# Altium PCB BMS_MAINBOARD_3.PcbDoc (part 3 of 3)
Units mm, origin at the board's own origin, x right, y up, seen from the top; angles counter-clockwise.
Board outline 295.3 x 101.15 mm, 2 copper layers (Top Layer, Bottom Layer), stack 1.571 mm thick; 250 components, 184 nets, 817 pads, 458 vias.
Unrouted connection lines stored in the file: 84.
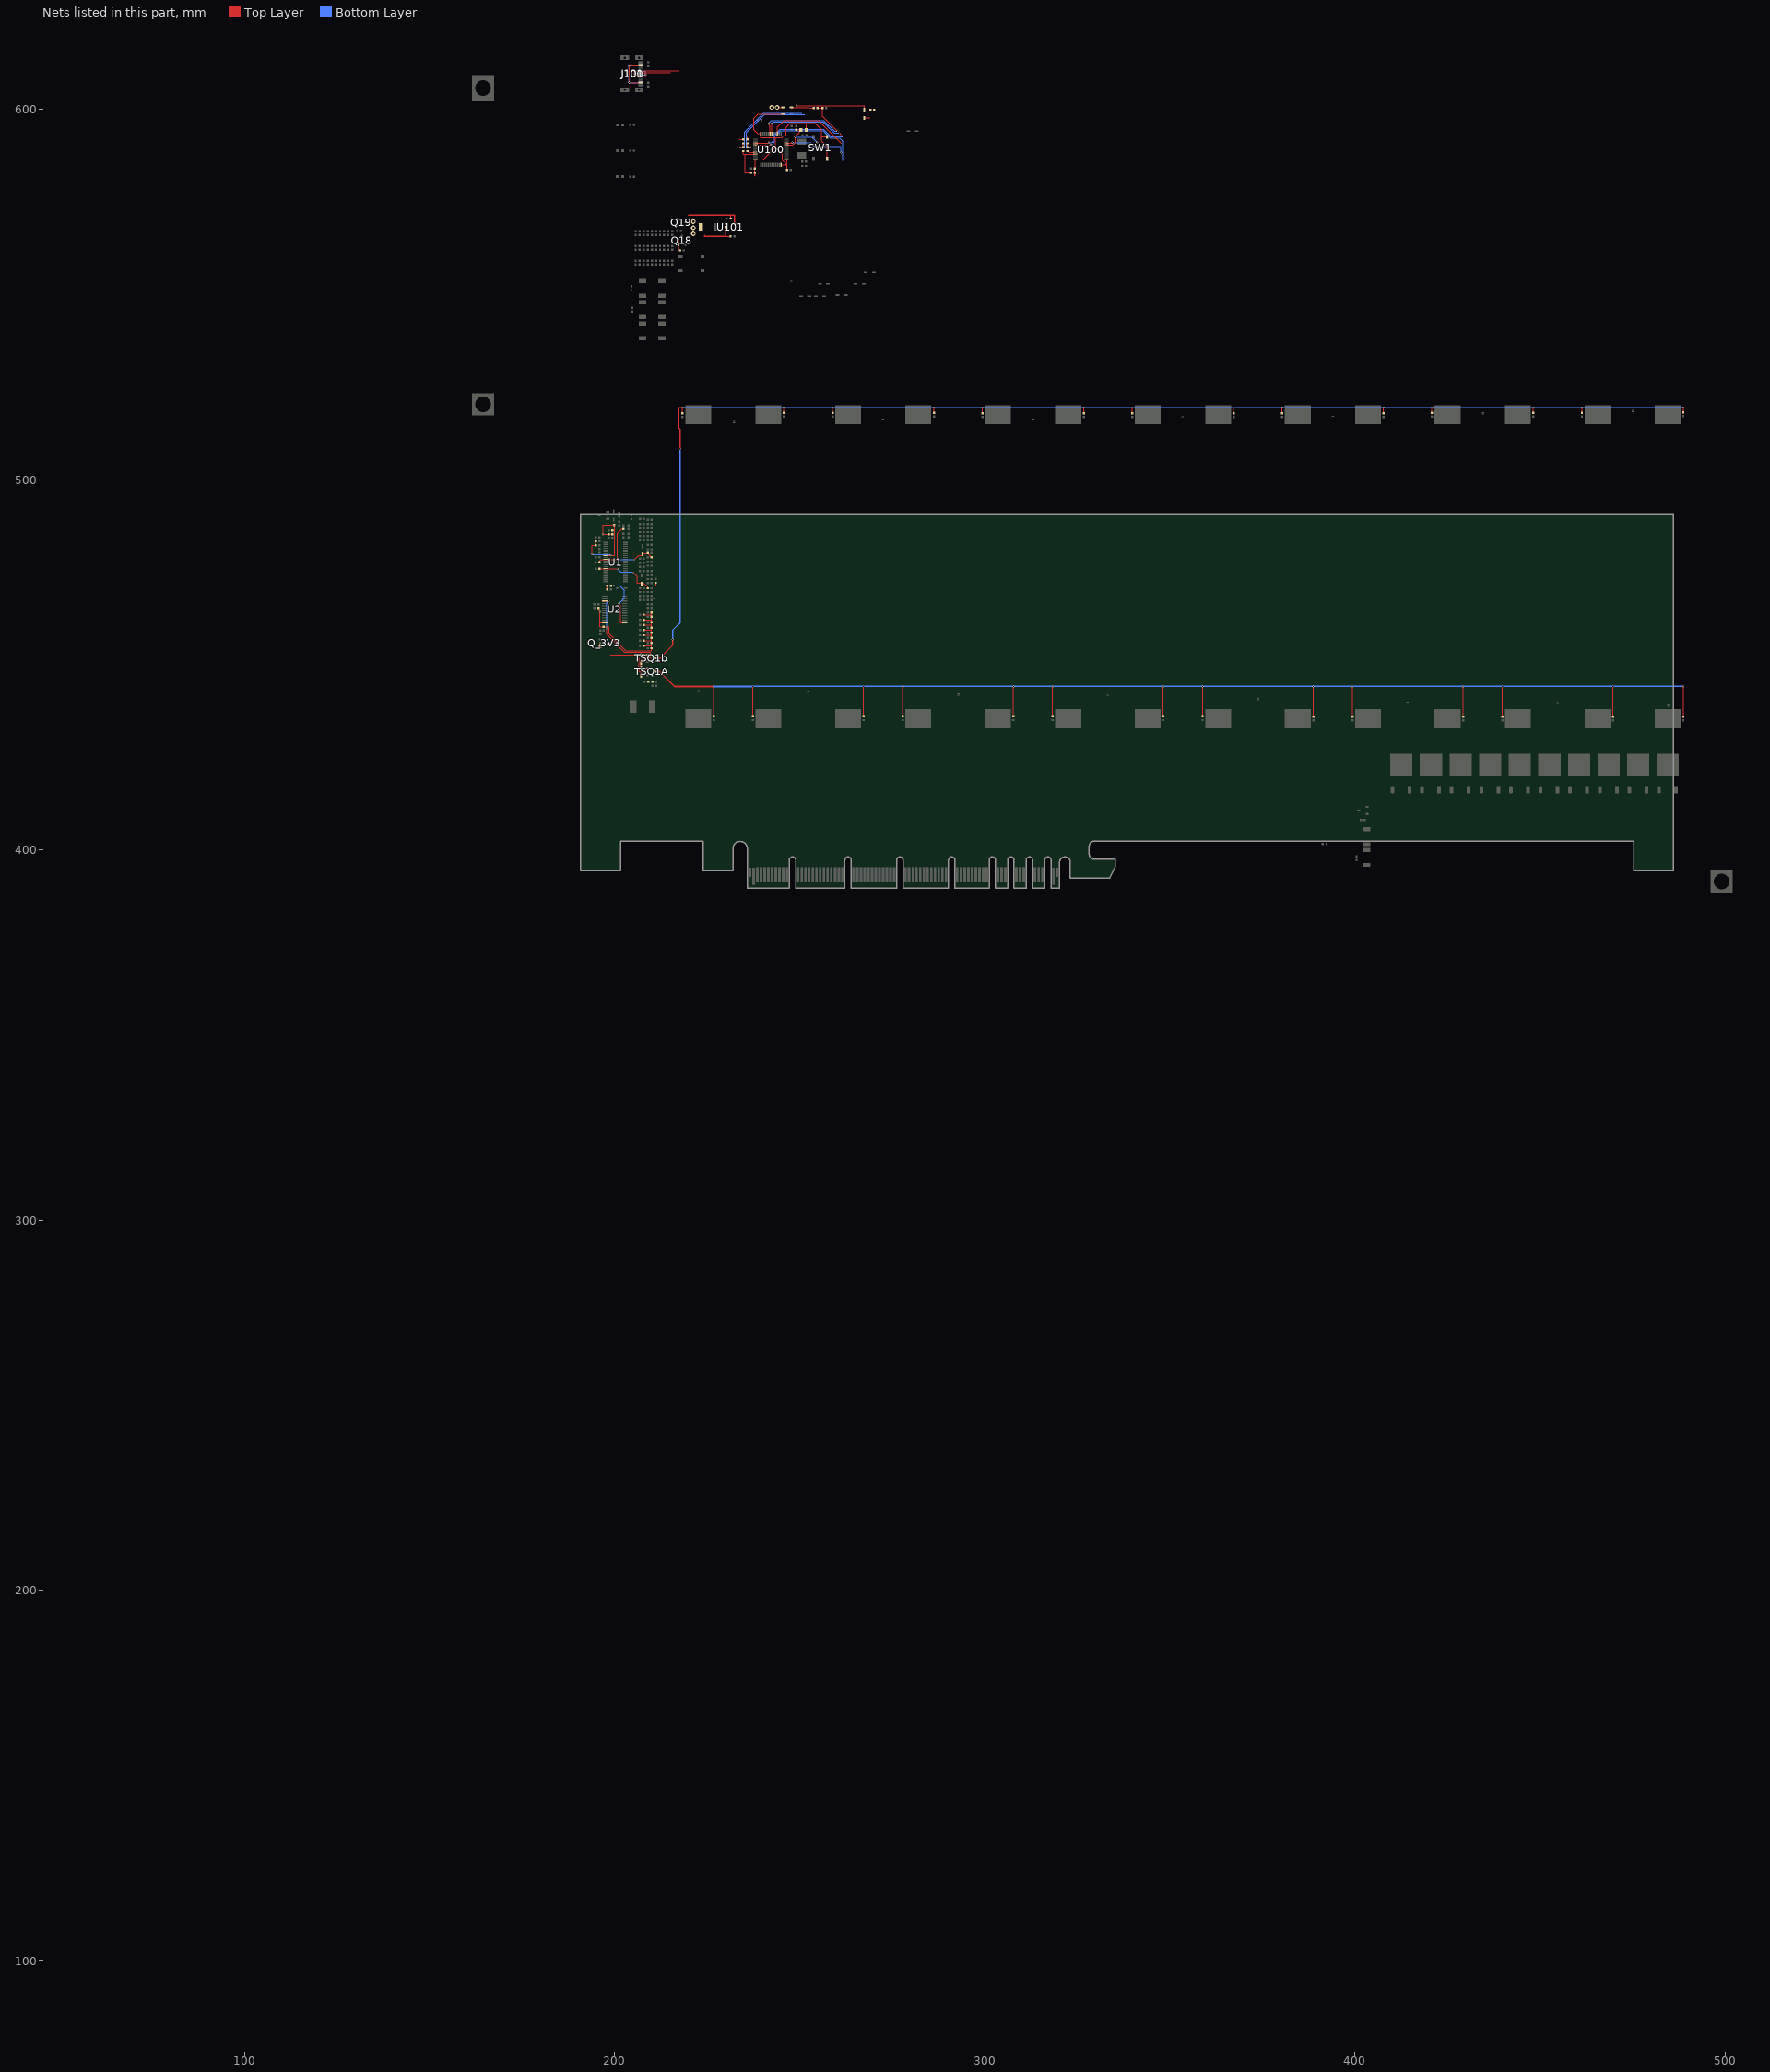
[diagram p3: the nets of this part, all layers, seen from the top]

## Via types
v1: diameter 0.48, hole 0.254, Top Layer to Bottom Layer, tented both sides, 384 vias
v2: diameter 0.508, hole 0.254, Top Layer to Bottom Layer, tented both sides, 54 vias
v3: diameter 1.27, hole 0.6, Top Layer to Bottom Layer, tented both sides, 20 vias

## Nets (pads, with @x,y where several pads share a name; then routed paths per layer and width w, separated by ;. In a path a pad name is that pad's centre, name@x,y a point inside that pad or via, vN(x,y) a via of type N, cw(c..) or ccw(c..) an arc to the next point about the centre after c; other vN are vias at no path point) (continued)
TS_A_GND: TS_C1_A.1 TS_C2_A.1 TS_C3_A.1 TS_C4_A.1 TS_C5_A.1 TS_C6_A.1 TS_C7_A.1 TS_C8_A.1 TS_C9_A.1 TS_C10_A.1 TS_C11_A.1 TS_C12_A.1 TS_C13A.1 TS_C14_A.1 TSQ1A.3 | length 393.2
  Top Layer w0.2: TS_C1_A.1@226.7,435.908 TS_C1_A.1@226.7,436.108 v1(226.7,444.2) v1@226.7,444.3 ; TS_C2_A.1@237.3,436.108 v1@237.3,444.2 ; TS_C3_A.1@267.2,436.108 v1@267.2,444.2 ; TS_C4_A.1@277.8,436.108 v1@277.8,444.2 ; TS_C5_A.1@307.7,436.108 v1@307.7,444.2 ; TS_C6_A.1@318.3,436.108 v1@318.3,444.2 ; TS_C7_A.1@348.2,436.108 v1@348.2,444.2 ; TS_C8_A.1@358.8,436.108 v1@358.8,444.2 ; TS_C14_A.1@388.7,436.008 v1@388.7,444.2 ; TS_C13A.1@399.3,436.008 v1@399.3,444.2 ; TS_C12_A.1@429.2,436.008 v1@429.2,444.2 ; TS_C11_A.1@439.8,436.008 v1@439.8,444.2 ; TS_C10_A.1@469.7,436.008 v1@469.7,444.2 ; TS_C9_A.1@488.7,436.008 v1@488.7,444.2
  Top Layer w0.4: TSQ1A.3@211.25,448.2 212.1,448.2 216.1,444.2 v1(226.7,444.2)
  Bottom Layer w0.4: v1(226.7,444.2) 237.281,444.2 v1(237.3,444.219) v1(267.2,444.219) v1(277.8,444.219) v1(307.7,444.219) v1(318.3,444.219) v1(348.2,444.219) v1(358.8,444.219) v1(388.7,444.219) v1(399.3,444.219) v1(429.2,444.219) v1(439.8,444.219) v1(469.7,444.219) v1@488.6,444.219
  other v1: 488.7,444.219
TS_B_GND: TS_C1_B.1 TS_C2_B.1 TS_C3_B.1 TS_C4_B.1 TS_C5_B.1 TS_C6_B.1 TS_C7_B.1 TS_C8_B.1 TS_C9_B.1 TS_C10_B.1 TS_C11_B.1 TS_C12_B.1 TS_C13_B.1 TS_C14_B.1 TSQ1b.3 | length 363.6
  Top Layer w0.2: TS_C1_B.1@218.3,518 TS_C1_B.1@218.3,518.008 v1(218.3,519.5) ; TS_C2_B.1@245.6,518 v1(245.6,519.5) ; TS_C3_B.1@258.8,518 v1(258.8,519.5) ; TS_C4_B.1@286.2,518 v1(286.2,519.5) ; TS_C5_B.1@299.3,518 TS_C5_B.1@299.3,518.008 v1(299.3,519.5) ; TS_C6_B.1@326.7,518 TS_C6_B.1@326.7,518.008 v1(326.7,519.5) ; TS_C7_B.1@339.8,518 TS_C7_B.1@339.8,518.008 v1(339.8,519.5) ; TS_C8_B.1@367.2,518.1 v1(367.2,519.6) ; TS_C14_B.1@380.3,518.008 v1(380.3,519.5) ; TS_C13_B.1@407.7,518.008 v1(407.7,519.5) ; TS_C12_B.1@420.8,518.008 TS_C12_B.1@420.8,518.108 v1(420.8,519.5) ; TS_C11_B.1@448.2,518.008 TS_C11_B.1@448.2,518.108 v1(448.2,519.5) ; TS_C10_B.1@461.3,518.008 TS_C10_B.1@461.3,518.108 v1(461.3,519.5) ; TS_C9_B.1@488.7,518.008 TS_C9_B.1@488.7,518.208 v1(488.7,519.5)
  Top Layer w0.4: TSQ1b.3@211.1,451.8 212.1,451.8 215.6,455.3 v1(215.6,456.9) ; v1(217.6,508.4) 217.6,513.7 217.2,514.1 217.2,519.5 v1(218.3,519.5)
  Bottom Layer w0.4: v1(215.6,456.9) 215.6,459.4 217.6,461.4 v1(217.6,508.4) ; v1(218.3,519.5) v1(245.6,519.5) v1(258.8,519.5) v1(286.2,519.5) v1(299.3,519.5) v1(326.7,519.5) v1(339.8,519.5) v1(380.3,519.5) v1(407.7,519.5) v1(420.8,519.5) v1(448.2,519.5) v1(461.3,519.5) v1(488.7,519.5)
TS_EN_a: D1.2 TSQ1A.1 U100.27 | length 37.8
  Top Layer w0.2: 203.2,452.2 205.9,452.2 206.5,451.6 206.5,448.3 207.1,448.3 ; D1.2@207.1,447.1 207.1,447.2 207.1,447.5 207.1,448.3 ; TSQ1A.1@208.6,449 207.9,448.3 207.1,448.3 ; TSQ1A.1@208.8,449.2 TSQ1A.1@208.8,449.1 ; TSQ1A.1@209,449.2 TSQ1A.1@208.9,449.1 ; TSQ1A.1@209.1,449.1 TSQ1A.1@208.9,449.1 ; U100.27@237.987,591 241.465,591 v2@241.565,591.1 ; TSQ1A.1@208.8,449.1 TSQ1A.1@208.9,449.1 ; TSQ1A.1@208.8,449.1 208.8,449 TSQ1A.1@208.9,449.1
  Bottom Layer w0.2: v2@241.712,591.1 242.319,591.1 242.812,591.593 242.812,592.893 244.619,594.7 253.019,594.7 256.412,594.7 257.912,593.2 258.412,592.7 v1(261.619,592.7)
  other v2: 241.612,591.1
TS_EN_b: D2.2 TSQ1b.1 U100.28 | length 42.4
  Top Layer w0.2: 198.8,452.7 D2.2@207.1,452.7 TSQ1b.1@208.9,452.7 ; U100.28@237.987,590.5 v2(242.112,590.5)
  Bottom Layer w0.2: v2@242.212,590.6 242.519,590.6 243.212,591.293 243.212,592.693 244.819,594.3 252.719,594.3 256.212,594.3 258.216,592.297 260.722,592.297 261.619,591.4 261.619,586.2
TS_EN_MUX: D1.1 D2.1 U2.15 | length 31.1
  Top Layer w0.2: U2.15@196.7,467.287 U2.15@197.25,467.287 v1@198.45,467.287 ; v1(197.8,459.7) 197.8,458.3 202.6,453.5 209.6,453.5 209.6,452 207.8,452 207.1,451.3 D2.1@207.1,450.5 D1.1@207.1,449.3
  Bottom Layer w0.2: v1(197.8,459.7) 197.8,466.6 197.7,466.7 v1@198.3,467.3
  other v1: 198.4,467.3
TS_MULTIPLEXED: R2.2 U2.1 | length 14.5
  Top Layer w0.2: R2.2@198.908,471.412 v1(199.7,471.412) ; v1(201.1,466.6) 201.6,466.1 201.6,461.4 U2.1@202.3,461.4
  Bottom Layer w0.2: v1@199.7,471.512 199.812,471.4 201.3,471.4 202.6,470.1 202.6,468.1 v1(201.1,466.6)
TS_MUX_FILTERED: C2.2 R2.1 U100.15 | length 23.5
  Top Layer w0.2: R2.1@197.8,471.4 197.892,471.308 C2.2@197.892,470.412 ; U100.15@243.912,593.3 243.912,595.293 245.719,597.1 255.019,597.1 261.119,591
USB_DM: R100.1 R103.1 | length 24.8
  Top Layer w0.2: R100.1@235.819,589.7 235.819,589.8 v2(236.619,589.8) ; R103.1@235.819,590.892 235.819,589.9 R100.1@235.919,589.9
  Bottom Layer w0.2: v2(236.619,589.8) 235.519,589.8 235.519,593.8 240.419,598.7 251.219,598.7
USB_DM_P: J100.A7 J100.B7 J101.A7 J101.B7 R103.2 | length 19.4
  Top Layer w0.2: J100.A7@206.919,609.45 205.319,609.45 205.319,610.45 J100.B7@206.916,610.45 206.916,610.5 217.319,610.5 ; R103.2@235.819,592 235.819,592.6
  Bottom Layer w0.2: J101.B7@206.916,608.95 205.319,608.95 v2(205.319,609.4) 205.319,609.95 J101.A7@206.919,609.95
USB_DM_R: R100.2 U100.32 | length 1.9
  Top Layer w0.2: R100.2@235.919,588.8 236.219,588.5 U100.32@237.712,588.5
USB_DP: R101.1 R104.1 | length 24.6
  Top Layer w0.2: v2(233.919,589.8) R101.1@234.619,589.8 ; R101.1@234.719,589.8 R101.1@234.719,589.808 R104.1@234.719,590.892
  Bottom Layer w0.2: v2@234.019,589.8 235.019,589.8 235.019,594 240.119,599.1 250.519,599.1
USB_DP_P: J100.A6 J100.B6 J101.A6 J101.B6 R104.2 | length 16
  Top Layer w0.2: J100.B6@206.916,608.95 208.319,608.95 v2(208.319,609.5) 208.319,610 ; J100.A6@206.916,609.95 206.966,610 208.319,610 ; 215.019,610 208.319,610 ; 233.519,592.1 233.719,591.9 R104.2@234.919,591.9
  Bottom Layer w0.2: J101.A6@206.916,609.45 208.319,609.45 v2(208.319,609.5) 208.319,610.1 208.312,610.107 208.312,610.4 ; J101.B6@206.916,610.45 208.319,610.45 208.319,610.3
USB_DP_R: R101.2 R106.1 U100.33 | length 10.5
  Top Layer w0.2: R101.2@234.719,588.6 234.719,588 235.219,588 ; R106.1@236.811,583 235.219,583 235.219,588 ; U100.33@237.987,588 235.219,588
VBUS_SNS: R_VBUS2.1 R_VBUS3.2 U100.18 | length 22.9
  Top Layer w0.2: v2(242.319,596.2) 242.412,596.107 U100.18@242.412,593.8 ; v1(260.619,593.7) 261.119,593.2
  Bottom Layer w0.2: v2(242.319,596.2) 242.819,596.7 256.219,596.7 259.219,593.7 ; 259.213,593.7 259.219,593.7 ; v1(260.619,593.7) 259.219,593.7
VC5x: CAP2.2 CC5A.2 CC5B.1 DC5.1 RSHUNT.1 U1.10 | length 24.5
  Top Layer w0.2: CAP2.2@196,477.912 196,478.212 196.35,478.562 U1.10@197.525,478.562 v1@200.75,478.562 ; v1@200.7,478.612 200.7,485.619 201.8,486.719 RSHUNT.1@202.3,486.719 ; v1@205.3,478.412 205.3,478.512 206.4,479.612 DC5.1@207.5,479.612 ; DC5.1@207.4,480.112 208.9,480.112 CC5B.1@209.908,479.104
  Bottom Layer w0.2: v1@200.8,478.512 205.2,478.512 v1@205.3,478.412
  other v1: 205.3,478.419 200.7,478.512
VC10x: CAP3.2 CC10A.2 CC10B.1 DC10.1 U1.15 | length 20.7
  Top Layer w0.2: CAP3.2@195.7,476.212 CAP3.2@196,476.212 ; CAP3.2@195.9,476.019 195.943,476.062 U1.15@197.525,476.062 197.568,476.019 v1(200.7,476.019) ; v1@204.95,474.962 206,473.912 206,472.162 DC10.1@207,472.162 ; DC10.1@207.1,472.212 207.692,472.212 ; 207.7,472.212 208.5,471.412 208.8,471.412 ; CC10B.1@208.892,470.712 208.892,471.32 208.8,471.412 ; CC10A.2@210.9,472.012 CC10A.2@211.1,472.212 ; CC10A.2@211,472.312 210.9,472.212 CC10A.2@211.1,472.212 ; CC10A.2@211.2,472.312 CC10A.2@211.1,472.212 ; 208.8,471.412 211.1,471.412 211.1,472.206 211.107,472.212 CC10A.2@211.1,472.212
  Bottom Layer w0.2: v1(200.7,476.019) 201.6,475.119 204.893,475.119 v1(205,475.012)
VCC_3V3: C102.2 C103.2 C104.2 D_3V3_O.2 L100.2 Q_3V3.2 R106.2 SW1.2 U100.1 U100.24 U100.36 U100.48 U101.2 | length 88
  Top Layer w0.2: v1(196,455.919) 196,455.019 Q_3V3.2@196.1,454.919 ; C104.2@231.277,570.6 231.277,571.458 231.369,571.55 ; U101.2@232.312,569.25 U101.2@232.369,569.25 ; U101.2@232.462,569.25 U101.2@232.512,569.3 ; R106.2@237.819,582.9 237.827,582.9 R106.2@237.827,583 C102.2@237.827,584.1 ; C102.2@237.919,584.1 U100.36@237.919,586.5 ; U100.36@238.319,586.5 240.019,586.5 243.419,589.9 ; U100.24@239.412,593.7 U100.24@239.412,593.6 ; U100.24@239.419,593.6 U100.24@239.412,593.6 ; U100.48@244.912,585.075 244.937,585.1 246.419,585.1 ; D_3V3_O.2@245.519,598.8 238.619,598.8 237.519,597.7 237.519,594.6 238.519,593.6 U100.24@239.412,593.6 ; C103.2@246.512,583.8 246.512,585.1 ; U100.1@246.512,586.5 246.512,585.1 ; L100.2@251.782,594.5 251.782,596.263 251.819,596.3 ; 255.819,592 255.819,592.7 ; SW1.2@257.212,592.7 255.819,592.7 ; SW1.2@257.369,586.75 257.319,586.8 257.319,590 255.812,591.507 255.812,592.7 255.819,592.7 ; U100.24@239.412,593.6 239.412,592.5 243.419,592.5 ; 243.419,589.9 243.419,592.5 ; 243.419,589.9 243.419,589.8 245.219,588 245.219,586.3 246.419,585.1 ; 243.419,592.5 245.112,592.5 245.512,592.9 245.912,592.9 246.212,593.2 246.212,595.193 247.319,596.3 251.819,596.3 ; 246.419,585.1 246.512,585.1 ; 251.819,596.3 254.112,596.3 255.819,594.593 255.819,592.7
  Top Layer w0.4: 219.85,571.55 231.369,571.55 232.312,571.55 U101.2@232.312,569.25 ; 237.819,582.181 R106.2@237.819,582.9
VCC_3V3_2: CR1.1 CR2.1 CR3.1 NT_2.2 U1.8 | length 20.4
  Top Layer w0.2: v1(193.9,479.919) 193.9,482.319 194.607,482.319 CR2.1@194.8,482.512 ; CR2.1@194.792,482.52 CR3.1@194.792,483.412 CR3.1@194.846,483.358 ; U1.8@197.9,479.612 199.9,479.612 199.9,486.312 ; CR1.1@199.5,486.312 CR1.1@199.6,486.312 ; CR1.1@199.508,486.32 199.55,486.362 CR1.1@199.6,486.312 ; 200,487.919 200,487.619 199.9,487.519 199.9,486.312 ; CR1.1@199.6,486.312 199.9,486.312
  Bottom Layer w0.2: v1@193.9,479.819 v1(193.9,479.919) 198.693,479.919 v1(198.9,479.712)
VCC_3V3_SW: 3V3R1.1 NT_2.1 Q_3V3.3 RSCL.1 RSDA.1 RT_0b.2 RT_1B.2 RT_2B.2 RT_3B.2 RT_4B.2 RT_5B.2 RT_6B.2 RT_7B.2 RT_8B.2 RT_9B.2 RT_10B.2 RT_11B.2 RT_12B.2 RT_13B.2 RT_14B.2 RT_15B.2 U2.24 | length 61.8
  Top Layer w0.2: RT_15B.2@195.6,465.419 RT_15B.2@195.6,465.411 195.6,464.804 196,464.404 196,463.819 ; v1(196,464.4) 196,461.52 ; U2.24@196.8,461.412 196,461.412 ; U2.24@197.25,461.437 196,461.437 ; RSCL.1@199.2,485.412 199.107,485.319 197.1,485.319 v1(196.8,485.319) 196.8,487.819 199.5,487.819 NT_2.1@199.7,488.019 ; RT_9B.2@207.808,455.219 209.9,455.219 ; RT_11B.2@207.808,456.419 208.008,456.619 209.9,456.619 RT_12B.2@209.9,457.219 ; RT_13B.2@207.808,458.019 209.9,458.019 209.9,457.319 RT_12B.2@209.908,457.319 ; RT_7B.2@207.808,459.419 209.9,459.419 ; RT_5B.2@207.808,460.819 209.9,460.819 ; RT_3B.2@207.808,462.219 209.9,462.219 ; RT_1B.2@207.808,463.619 209.9,463.619 ; RT_0b.2@209.8,464.219 209.9,464.119 209.9,463.619 ; RT_8B.2@209.9,454.719 209.9,455.219 ; RT_10B.2@209.9,455.919 209.9,455.219 ; RT_8B.2@209.908,454.519 209.908,453.9 202.9,453.9 198.4,458.4 198.4,460.3 196,460.3 196,461.412 ; RT_10B.2@209.908,455.927 RT_12B.2@209.908,457.319 ; RT_12B.2@210,457.319 RT_12B.2@209.908,457.319 ; 196,461.412 196,461.437 ; 196,461.412 196,461.437 ; 196,461.437 196,461.52 ; 196,461.437 196,461.52 ; 209.9,460.819 RT_4B.2@209.9,461.519 ; 209.9,460.819 209.9,460.119 RT_6B.2@209.908,460.119 ; RT_4B.2@209.9,461.519 209.9,462.019 ; RT_4B.2@209.9,461.519 RT_4B.2@209.908,461.519 ; 209.9,462.019 209.908,462.019 RT_4B.2@209.908,461.519 ; 209.9,462.019 209.9,462.219 ; 209.9,462.219 209.9,463.619 ; RT_12B.2@209.908,457.319 RT_14B.2@209.908,458.719 RT_6B.2@209.908,460.119 ; RT_6B.2@209.908,460.119 RT_4B.2@209.908,461.519
  Bottom Layer w0.2: v1(196,464.4) v1@196,464.419
VCC_5V1: C107.2 D5V1_SB.1 DS_VCC.1 J100.A4_B9 J100.A9_B4 J101.A4_B9 J101.A9_B4 Q19.3 U101.3 | length 38.9
  Top Layer w0.2: J100.A9_B4@206.719,607.3 v2(203.919,607.3) 203.919,611.9 206.916,611.9 J100.A4_B9@206.916,612.05 ; 229.969,565.85 231.118,565.85 C107.2@231.168,565.9 ; C107.2@231.119,565.846 C107.2@231.168,565.9 ; C107.2@231.261,565.9 C107.2@231.168,565.9 ; C107.2@231.261,566 231.211,565.946 231.186,565.919 C107.2@231.168,565.9 ; v3@243.419,600.6 v3(243.819,600.6) D5V1_SB.1@245.519,600.6
  Top Layer w0.3: Q19.3@219.162,569.6 221.319,569.6 v3@221.419,569.7 ; v3@221.219,570 221.219,570.55 ; 221.219,570.6 221.219,570.55 ; 224.112,570.5 224.062,570.55 221.219,570.55
  Top Layer w0.4: 224.269,566.05 224.269,565.8 229.969,565.8 229.969,565.85 ; 229.969,565.95 U101.3@229.969,568.25
  Bottom Layer w0.2: J101.A4_B9@206.619,607.3 v2(203.919,607.3) 203.819,607.3 203.819,612.05 J101.A9_B4@206.919,612.05
  other v2: 203.919,612
  other v3: 221.219,566.5 221.219,568.1 221.219,569.8 242.419,600.6
VCC_STBY: D5V1_SB.2 R_STBY1.2 | length 6.1
  Top Layer w0.2: D5V1_SB.2@247.619,600.6 D5V1_SB.2@247.719,600.6 v1(252.619,600.6) ; v1@252.719,600.6 252.919,600.4 R_STBY1.2@253.711,600.4
VDDA: C105.2 L100.1 U100.9 | length 13.9
  Top Layer w0.2: U100.9@246.512,590.5 248.119,590.5 248.719,591.1 v2(248.719,592.6) 249.912,593.793 249.912,594.2 L100.1@250.112,594.4 ; C105.2@249.012,594.592 249.92,594.592 L100.1@250.012,594.5
  Bottom Layer w0.2: v2(248.719,592.6) 253.219,592.6 v2(254.619,591.2)
VSTBY_SNS: R_STBY1.1 R_STBY2.2 U100.19 | length 32.5
  Top Layer w0.2: v2(241.619,596.2) 241.619,595.8 241.912,595.507 U100.19@241.912,593.5 ; R_STBY1.1@254.727,600.4 R_STBY2.2@256.111,600.4 R_STBY2.2@256.119,600.4 ; R_STBY2.2@256.319,600.5 256.219,600.4 R_STBY2.2@256.119,600.4 ; v1(260.119,594.2) 256.119,598.2 R_STBY2.2@256.119,600.4
  Bottom Layer w0.2: v2(241.619,596.2) 241.619,596.4 242.319,597.1 256.412,597.1 259.316,594.197 259.319,594.2 v1(260.119,594.2)
WAKEUP: D10.2 | length 19.4
  Top Layer w0.2: v1(249.119,601.1) 267.419,601.1 D10.2@267.419,600
WAKEUP_D: D10.1 R_WK.2 | length 1.4
  Top Layer w0.2: D10.1@267.519,597.8 268.911,597.8
WAKEUP_D_R: Q18.1 R_Q18G.1 R_WK.1 U100.10 | length 20.3
  Top Layer w0.2: Q18.1@217.119,563.6 217.219,563.7 v1(217.219,565) ; Q18.1@217.169,563.55 217.219,563.5 217.219,562.392 R_Q18G.1@217.611,562 ; U100.10@246.337,591 247.819,591 v2(247.919,591.1)
  Bottom Layer w0.2: v2(247.919,591.1) 252.919,591.1 253.919,590.1 261.119,590.1 v1(261.119,588.4) v1@261.219,588.5
pads on no net: J100.A8 J100.B8 J100.M J101.A8 J101.B8 J101.M U1.1 U1.2 U1.21 U1.22 U1.23
copper on no net: | length 10608.2
  Top Layer w0.2: 236.5,393.65 v1@236.5,396.05 ; 237.5,394 237.5,393.65 v1(237.5,396.1) ; 238.5,393.65 v1@238.5,396.05 ; 239.5,393.65 v1@239.5,396.05 ; 240.5,393.65 v1@240.5,396.05 ; 241.5,393.65 v1@241.5,396.05 ; 242.5,393.65 v1@242.5,396.15 ; 243.5,393.65 v1@243.5,396.05 ; 244.5,393.65 v1@244.5,396.05 ; 245.5,393.65 v1@245.5,396.05 ; 246.5,393.75 v1@246.5,396.15 ; 249.5,393.65 v1@249.5,396.05 ; 250.5,393.65 v1@250.5,396.05 ; 251.5,393.75 v1(251.5,396.1) ; 252.5,393.6 v1(252.5,396.1) ; 253.5,393.6 v1(253.5,396.1) ; 254.5,393.6 v1(254.5,396.1) ; 255.5,393.6 v1(255.5,396.1) ; 256.5,393.6 v1(256.5,396.1) ; 257.5,393.6 v1(257.5,396.1) v1@257.5,396.2 ; 258.5,393.6 v1(258.5,396.1) ; 259.5,393.6 v1(259.5,396.1) ; 260.5,393.6 v1(260.5,396.1) ; 261.5,393.6 v1(261.5,396.1) ; 318.5,393.75 v1(318.5,396.15) ; 319.5,394.1 319.5,394 319.5,393.75 v1(319.5,396.15)
  Top Layer w1: 216.7,447.2 490.7,447.2 490.7,448.8 216.7,448.8 216.7,450.4 490.7,450.4 490.7,452 216.7,452 216.7,453.6 490.7,453.6 490.7,455.2 216.7,455.2 216.7,456.8 490.7,456.8 490.7,458.4 216.7,458.4 216.7,460 490.7,460 490.7,461.6 216.7,461.6 216.7,463.2 490.7,463.2 490.7,464.8 216.7,464.8 216.7,466.4 490.7,466.4 490.7,468 216.7,468 216.7,469.6 490.7,469.6 490.7,471.2 216.7,471.2 216.7,472.8 490.7,472.8 490.7,474.4 216.7,474.4 216.7,476 490.7,476 490.7,477.6 216.7,477.6 216.7,479.2 490.7,479.2 490.7,480.8 216.7,480.8 216.7,482.4 490.7,482.4 490.7,484 216.7,484 216.7,485.6 490.7,485.6 490.7,487.2 216.7,487.2 216.7,488.8 490.7,488.8 490.7,490.4 216.7,490.4 216.7,492 490.7,492 490.7,493.6 216.7,493.6 216.7,495.2 490.7,495.2 490.7,496.8 216.7,496.8 216.7,498.4 490.7,498.4 490.7,500 216.7,500 216.7,501.6 490.7,501.6 490.7,503.2 216.7,503.2 216.7,504.8 490.7,504.8 490.7,506.4 216.7,506.4
  Bottom Layer w0.2: 236.5,393.65 v1@236.5,396.05 ; 237.5,393.65 v1@237.5,396.05 ; 237.5,394 v1@237.5,395.95 ; 240.5,393.65 v1@240.5,396.05 ; 241.5,393.65 v1@241.5,396.05 ; 242.5,393.65 v1@242.5,396.05 ; 243.5,393.65 v1@243.5,396.05 ; 244.5,393.65 v1@244.5,396.05 ; 245.5,393.65 v1@245.5,396.05 ; 246.4,393.65 246.5,393.75 246.5,396.15 v1@246.4,396.05 ; 249.5,393.6 v1(249.5,396.1) ; 250.5,393.6 v1(250.5,396.1) ; 251.5,393.6 v1(251.5,396.1) ; 252.5,393.6 v1(252.5,396.1) ; 253.5,393.6 v1(253.5,396.1) ; 254.5,393.6 v1(254.5,396.1) ; 255.5,393.6 v1(255.5,396.1) ; 256.5,393.6 v1(256.5,396.1) ; 257.5,393.6 v1(257.5,396.1) ; 258.5,393.6 v1(258.5,396.1) ; 259.5,393.6 v1(259.5,396.1) ; 260.5,393.6 v1(260.5,396.1) ; 261.5,393.6 v1(261.5,396.1) ; 318.5,393.75 v1(318.5,396.15) ; 319.5,393.75 v1(319.5,396.15) ; 319.5,394.1 v1@319.5,396.05 ; 238.5,393.65 238.5,396.05 238.5,393.65 ; 239.5,393.65 239.5,396.05 239.5,393.65
  other v1: 236.5,396.1 238.5,396.1 239.5,396.1 240.5,396.1 241.5,396.1 242.5,396.1 243.5,396.1 244.5,396.1 245.5,396.1 246.5,396.1
  other v3: 265.1,396.5 267.1,396.5 269.1,396.5 271.1,396.5 273.1,396.5 275.1,396.5 279.1,396.5 281.1,396.5 283.1,396.5 285.1,396.5 287.1,396.5 289.1,396.5

## Polygon pours and split planes (outlines as drawn)
GND on Bottom Layer "Bottom Layer-GND" (solid, remove dead copper, shelved, pour order 53): 64.5,171.994 141.073,171.994 141.073,115.294 64.5,115.294
no net on Bottom Layer "Top Layer-No Net" (solid, shelved, pour order 42): 93.493,110.8
no net on Mechanical 15 (solid, shelved): 200.7,124.7 202.9,124.7 203.3,124.3 206.5,124.3 cw(c206.5,123.7) 207.1,123.7 207.1,122.9 209,122.9 cw(c209,122.1) 209.8,122.1 209.8,120.8 230.2,120.8 230.2,125 234.4,125 234.4,137.8 230.2,137.8 230.2,140.5 222.8,140.5 cw(c222.8,141.2) 222.1,141.2 222.1,142 200.7,142
GND on Top Layer "Top Layer-GND" (solid, remove dead copper, shelved, pour order 51): 64.5,172 141.1,172 141.1,115.3 64.5,115.3

## Other copper
Top Layer:
  rectangle net CELL14: 470.5,431.4 480.6,443.7
  region net C15: 423,425 423,428 418,428 418,425
  region net C15: 439,425 439,428 434,428 434,425
  region net C15: 455,425 455,428 450,428 450,425
  region net C15: 471,425 471,428 466,428 466,425
  region net C15: 487,425 487,428 482,428 482,425
  rectangle net GQS: 412.5,415 415.5,419
  rectangle net GQS: 420.5,415 423.5,419
  rectangle net GQS: 428.5,415 431.5,419
  rectangle net GQS: 436.5,415 439.5,419
  rectangle net GQS: 444.5,415 447.5,419
  rectangle net GQS: 452.5,415 455.5,419
  rectangle net GQS: 460.5,415 463.5,419
  rectangle net GQS: 468.5,415 471.5,419
  rectangle net GQS: 484.5,415 487.5,419
  rectangle net GQS: 409.5,418 487.5,419.5
  rectangle net GQS: 476.5,415 479.5,419
  region net C15: 214.481,553.393 214.481,553.993 210.981,553.993 210.981,553.393
  region net C15: 215,552 215,552.993 210.4,552.993 210.4,552
  region net C15: 215,555.1 213.9,555.1 213.9,552 215,552
  region net C15: 211.5,555 210.4,555 210.4,552 211.5,552
  region net NetDS_1_2: 214.519,547.607 214.519,548.207 211.019,548.207 211.019,547.607
  region net NetDS_1_2: 210.919,550.007 210.919,549.407 214.419,549.407 214.419,550.007
  region net NetDS_1_2: 210.4,551.4 210.4,550.407 215,550.407 215,551.4
  rectangle net NetDS_1_2: 210.519,548.807 211.419,551.407
  rectangle net NetDS_1_2: 210.4,546.3 211.5,551.4
  rectangle net NetDS_1_2: 213.9,546.3 215,551.4
  region net NetDS_1_2: 210.4,547.3 210.4,546.307 215,546.307 215,547.3
  region net NetDS_2_2: 214.519,541.907 214.519,542.507 211.019,542.507 211.019,541.907
  region net NetDS_2_2: 210.919,544.307 210.919,543.707 214.419,543.707 214.419,544.307
  region net NetDS_2_2: 210.4,545.7 210.4,544.707 215,544.707 215,545.7
  rectangle net NetDS_2_2: 210.519,543.107 211.419,545.707
  rectangle net NetDS_2_2: 210.4,540.6 211.5,545.7
  rectangle net NetDS_2_2: 213.9,540.6 215,545.7
  region net NetDS_2_2: 210.4,541.6 210.4,540.607 215,540.607 215,541.6
  rectangle net NetDS_3_2: 213.9,536.6 215,540
  rectangle net NetDS_3_2: 209.6,536.6 211.5,540
  rectangle net NetDS_3_2: 210.519,537.407 211.419,540.007
  region net NetDS_3_2: 210.4,540 210.4,539.007 215,539.007 215,540
  region net NetDS_3_2: 210.919,538.607 210.919,538.007 215,538.007 215,538.607
  region net NetDS_3_2: 210.4,537.6 210.4,536.607 215,536.607 215,537.6
  region net NetDS_3_2: 205.2,537.6 205.2,536.607 209.8,536.607 209.8,537.6
  region net NetDS_3_2: 205.719,538.607 205.719,538.007 209.8,538.007 209.8,538.607
  region net NetDS_3_2: 205.2,540 205.2,539.007 209.8,539.007 209.8,540
  rectangle net NetDS_3_2: 205.319,537.407 206.219,540.007
  rectangle net NetDS_3_2: 205.2,536.6 206.3,540
  rectangle net NetDS_3_2: 208.7,536.6 209.8,540
  region net NetDS_6_2: 209.319,553.307 209.319,553.907 205.819,553.907 205.819,553.307
  region net NetDS_6_2: 205.719,555.707 205.719,555.107 209.219,555.107 209.219,555.707
  region net NetDS_6_2: 205.2,557.1 205.2,556.107 209.8,556.107 209.8,557.1
  rectangle net NetDS_6_2: 205.319,554.507 206.219,557.107
  rectangle net NetDS_6_2: 205.2,552 206.3,557.1
  rectangle net NetDS_6_2: 208.7,552 209.8,557.1
  region net NetDS_6_2: 205.2,553 205.2,552.007 209.8,552.007 209.8,553
  region net NetDS_5_2: 209.319,547.607 209.319,548.207 205.819,548.207 205.819,547.607
  region net NetDS_5_2: 205.719,550.007 205.719,549.407 209.219,549.407 209.219,550.007
  region net NetDS_5_2: 205.2,551.4 205.2,550.407 209.8,550.407 209.8,551.4
  rectangle net NetDS_5_2: 205.319,548.807 206.219,551.407
  rectangle net NetDS_5_2: 205.2,546.3 206.3,551.4
  rectangle net NetDS_5_2: 208.7,546.3 209.8,551.4
  region net NetDS_5_2: 205.2,547.3 205.2,546.307 209.8,546.307 209.8,547.3
  region net NetDS_4_2: 205.2,541.6 205.2,540.607 209.8,540.607 209.8,541.6
  rectangle net NetDS_4_2: 208.7,540.6 209.8,545.7
  rectangle net NetDS_4_2: 205.2,540.6 206.3,545.7
  rectangle net NetDS_4_2: 205.319,543.107 206.219,545.707
  region net NetDS_4_2: 205.2,545.7 205.2,544.707 209.8,544.707 209.8,545.7
  region net NetDS_4_2: 205.719,544.307 205.719,543.707 209.219,543.707 209.219,544.307
  region net NetDS_4_2: 209.319,541.907 209.319,542.507 205.819,542.507 205.819,541.907
  rectangle net GND: 221.519,436.5 223.519,438.7
  rectangle net GND: 212.2,438.5 226,443.8
  region net GND: 217.3,436.5 217.3,434.5 224.7,434.5 224.7,436.5
  rectangle net GND: 212.2,433.1 218.6,443.8
  rectangle net CELL14: 474,433.1 480.6,438.9
  region net CELL14: 476,436.6 476,434.6 484.6,434.6 484.6,436.6
  rectangle net CELL14: 474,438.5 488,443.7
  rectangle net CELL14: 483.519,436.5 485.519,438.7
  rectangle net CELL12: 447.9,433.1 461.6,438.9
  region net CELL12: 446.2,436.5 446.2,434.5 463.2,434.5 463.2,436.5
  rectangle net CELL12: 440.5,438.5 469,443.7
  rectangle net CELL12: 443.019,436.5 445.019,438.7
  rectangle net CELL12: 464.519,436.5 466.519,440.3
  rectangle net CELL10: 407.4,433.1 421.1,438.9
  region net CELL10: 405.7,436.5 405.7,434.5 422.7,434.5 422.7,436.5
  rectangle net CELL10: 400,438.5 428.5,443.7
  rectangle net CELL10: 402.519,436.5 404.519,438.7
  rectangle net CELL10: 424.019,436.5 426.019,440.3
  rectangle net CELL8: 366.9,433.1 380.6,438.9
  region net CELL8: 365.2,436.5 365.2,434.5 382.2,434.5 382.2,436.5
  rectangle net CELL8: 359.5,438.5 388,443.7
  rectangle net CELL8: 362.019,436.5 364.019,438.7
  rectangle net CELL8: 383.519,436.5 385.519,440.3
  rectangle net CELL6: 326.4,433.1 340.1,438.9
  region net CELL6: 324.7,436.5 324.7,434.5 341.7,434.5 341.7,436.5
  rectangle net CELL6: 319,438.5 347.5,444
  rectangle net CELL6: 321.519,436.5 323.519,438.7
  rectangle net CELL6: 343.019,436.5 345.019,440.3
  rectangle net CELL4: 285.9,433.1 299.6,438.9
  region net CELL4: 284.2,436.5 284.2,434.5 301.2,434.5 301.2,436.5
  rectangle net CELL4: 278.5,438.5 307,443.7
  rectangle net CELL4: 281.019,436.5 283.019,438.7
  rectangle net CELL4: 302.519,436.5 304.519,440.3
  rectangle net CELL2: 245.4,433.1 259.1,438.9
  region net CELL2: 243.7,436.5 243.7,434.5 260.7,434.5 260.7,436.5
  rectangle net CELL2: 238,438.5 266.5,443.7
  rectangle net CELL2: 240.519,436.5 242.519,438.7
  rectangle net CELL2: 262.019,436.5 264.019,440.3
  region net CELL13: 480.6,520.1 469.381,520.1 469.381,514.3 480.6,514.3
  region net CELL13: 483.5,516.7 483.5,518.7 466.5,518.7 466.5,516.7
  region net CELL13: 487.981,514.7 461.981,514.7 461.981,510.2 487.981,510.2
  region net CELL13: 485.481,516.7 483.481,516.7 483.481,514.5 485.481,514.5
  region net CELL13: 466.481,516.7 464.481,516.7 464.481,512.9 466.481,512.9
  region net CELL11: 440.1,520.1 428.881,520.1 428.881,514.3 440.1,514.3
  region net CELL11: 443,516.7 443,518.7 426,518.7 426,516.7
  region net CELL11: 447.481,514.7 421.481,514.7 421.481,510.2 447.481,510.2
  region net CELL11: 444.981,516.7 442.981,516.7 442.981,514.5 444.981,514.5
  region net CELL11: 425.981,516.7 423.981,516.7 423.981,512.9 425.981,512.9
  region net CELL9: 399.6,520.1 388.381,520.1 388.381,514.3 399.6,514.3
  region net CELL9: 402.5,516.7 402.5,518.7 385.5,518.7 385.5,516.7
  region net CELL9: 406.981,514.7 380.981,514.7 380.981,510.2 406.981,510.2
  region net CELL9: 404.481,516.7 402.481,516.7 402.481,514.5 404.481,514.5
  region net CELL9: 385.481,516.7 383.481,516.7 383.481,512.9 385.481,512.9
  region net CELL7: 359.1,520.1 347.881,520.1 347.881,514.3 359.1,514.3
  region net CELL7: 362,516.7 362,518.7 345,518.7 345,516.7
  region net CELL7: 366.481,514.7 340.481,514.7 340.481,510.2 366.481,510.2
  region net CELL7: 363.981,516.7 361.981,516.7 361.981,514.5 363.981,514.5
  region net CELL7: 344.981,516.7 342.981,516.7 342.981,512.9 344.981,512.9
  region net CELL5: 318.6,520.1 307.381,520.1 307.381,514.3 318.6,514.3
  region net CELL5: 321.5,516.7 321.5,518.7 304.5,518.7 304.5,516.7
  region net CELL5: 325.981,514.7 299.981,514.7 299.981,510.2 325.981,510.2
  region net CELL5: 323.481,516.7 321.481,516.7 321.481,514.5 323.481,514.5
  region net CELL5: 304.481,516.7 302.481,516.7 302.481,512.9 304.481,512.9
  region net CELL3: 278.1,520.1 266.881,520.1 266.881,514.3 278.1,514.3
  region net CELL3: 281,516.7 281,518.7 264,518.7 264,516.7
  region net CELL3: 285.481,514.7 259.481,514.7 259.481,510.2 285.481,510.2
  region net CELL3: 282.981,516.7 280.981,516.7 280.981,514.5 282.981,514.5
  region net CELL3: 263.981,516.7 261.981,516.7 261.981,512.9 263.981,512.9
  rectangle net CELL14: 410.3,427 488,432
  region net NetDS_6_2: 215.912,557.6 205.212,557.6 205.212,556 215.912,556
  rectangle net NetQ19_2: 205.212,567.8 215.912,571.1
  region net CELL1: 237.6,520.1 226.381,520.1 226.381,514.3 237.6,514.3
  region net CELL1: 239.081,516.7 239.081,518.7 223.981,518.7 223.981,516.7
  region net CELL1: 244.981,514.7 218.981,514.7 218.981,510.2 244.981,510.2
  region net VCC_5V1: 222.312,567.1 222.312,566.2 224.912,566.2 224.912,567.1
  region net VCC_5V1: 225.012,565.6 225.012,567.1 220.112,567.1 220.112,565.6
  region net VCC_5V1: 225.012,569.7 225.012,571.1 220.119,571.1 220.119,569.7
  rectangle net GND: 225.412,566.4 226.412,570.6
  region net VCC_5V1: 225.012,570.6 224.012,570.6 224.012,566.2 225.012,566.2
  rectangle net GND: 228.012,566.4 229.012,570.6
  region net CELL1: 242.481,516.6 240.481,516.6 240.481,514.5 242.481,514.5
  rectangle net VCC_5V1: 220.112,566.2 222.412,570.6
  rectangle net NetQ19_2: 207.712,567.2 207.912,568.6
  region net GND: 229.012,569.7 229.012,571.1 225.412,571.1 225.412,569.7
  region net NetRS_0_1: 215.912,561.6 215.112,561.6 215.112,559.8 215.912,559.8
  region net NetRS_10_1: 215.912,565.6 215.112,565.6 215.112,563.8 215.912,563.8
  rectangle net VCC_5V1: 241.719,599.9 244.519,601.3
  region net NetDS_6_2: 207.912,558.2 207.712,558.2 207.712,556.8 207.912,556.8
  region net NetRS_7_1: 207.912,562.2 207.712,562.2 207.712,559.2 207.912,559.2
  region net NetRS_7_1: 208.212,561.6 207.412,561.6 207.412,559.8 208.212,559.8
  region net NetRS_17_1: 207.912,566.2 207.712,566.2 207.712,563.2 207.912,563.2
  region net NetRS_17_1: 208.212,565.6 207.412,565.6 207.412,563.8 208.212,563.8
  region net NetRS_5_1: 210.412,561.6 209.612,561.6 209.612,559.8 210.412,559.8
  region net NetRS_15_1: 210.412,565.6 209.612,565.6 209.612,563.8 210.412,563.8
  region net NetRS_3_1: 212.612,561.6 211.812,561.6 211.812,559.8 212.612,559.8
  region net NetRS_13_1: 212.612,565.6 211.812,565.6 211.812,563.8 212.612,563.8
  region net NetRS_9_1: 206.012,561.6 205.212,561.6 205.212,559.8 206.012,559.8
  region net NetRS_19_1: 206.012,565.6 205.212,565.6 205.212,563.8 206.012,563.8
  region net GND: 229.012,566.4 229.012,567.1 225.412,567.1 225.412,566.4
  region net CELL1: 223.481,516.6 221.481,516.6 221.481,512.9 223.481,512.9
  rectangle net GND: 226.912,566.6 227.512,570.1
  region net VCC_5V1: 223.512,570.2 222.912,570.2 222.912,566.7 223.512,566.7
  rectangle net NetQ19_2: 215.412,567.2 215.612,568.6
  rectangle net NetQ19_2: 214.312,567.2 214.512,568.6
  rectangle net NetQ19_2: 212.112,567.2 212.312,568.6
  rectangle net NetQ19_2: 213.212,567.2 213.412,568.6
  rectangle net NetQ19_2: 209.912,567.2 210.112,568.6
  rectangle net NetQ19_2: 211.012,567.2 211.212,568.6
  rectangle net NetQ19_2: 208.812,567.2 209.012,568.6
  rectangle net NetQ19_2: 206.612,567.2 206.812,568.6
  rectangle net NetQ19_2: 205.512,567.2 205.712,568.6
  region net NetDS_6_2: 215.612,558.2 215.412,558.2 215.412,556.8 215.612,556.8
  region net NetDS_6_2: 214.512,558.2 214.312,558.2 214.312,556.8 214.512,556.8
  region net NetRS_0_1: 215.612,562.2 215.412,562.2 215.412,559.2 215.612,559.2
  region net NetRS_10_1: 215.612,566.2 215.412,566.2 215.412,563.2 215.612,563.2
  region net NetRS_1_1: 214.512,562.2 214.312,562.2 214.312,559.2 214.512,559.2
  region net NetRS_1_1: 214.812,561.6 214.012,561.6 214.012,559.8 214.812,559.8
  region net NetRS_11_1: 214.512,566.2 214.312,566.2 214.312,563.2 214.512,563.2
  region net NetRS_11_1: 214.812,565.6 214.012,565.6 214.012,563.8 214.812,563.8
  region net NetDS_6_2: 212.312,558.2 212.112,558.2 212.112,556.8 212.312,556.8
  region net NetDS_6_2: 213.412,558.2 213.212,558.2 213.212,556.8 213.412,556.8
  region net NetRS_3_1: 212.312,562.2 212.112,562.2 212.112,559.2 212.312,559.2
  region net NetRS_13_1: 212.312,566.2 212.112,566.2 212.112,563.2 212.312,563.2
  region net NetRS_2_1: 213.712,561.6 212.912,561.6 212.912,559.8 213.712,559.8
  region net NetRS_12_1: 213.712,565.6 212.912,565.6 212.912,563.8 213.712,563.8
  region net NetRS_2_1: 213.412,562.2 213.212,562.2 213.212,559.2 213.412,559.2
  region net NetRS_12_1: 213.412,566.2 213.212,566.2 213.212,563.2 213.412,563.2
  region net NetDS_6_2: 210.112,558.2 209.912,558.2 209.912,556.8 210.112,556.8
  region net NetDS_6_2: 211.212,558.2 211.012,558.2 211.012,556.8 211.212,556.8
  region net NetRS_5_1: 210.112,562.2 209.912,562.2 209.912,559.2 210.112,559.2
  region net NetRS_15_1: 210.112,566.2 209.912,566.2 209.912,563.2 210.112,563.2
  region net NetRS_4_1: 211.212,562.2 211.012,562.2 211.012,559.2 211.212,559.2
  region net NetRS_4_1: 211.512,561.6 210.712,561.6 210.712,559.8 211.512,559.8
  region net NetRS_14_1: 211.212,566.2 211.012,566.2 211.012,563.2 211.212,563.2
  region net NetRS_14_1: 211.512,565.6 210.712,565.6 210.712,563.8 211.512,563.8
  region net NetDS_6_2: 209.012,558.2 208.812,558.2 208.812,556.8 209.012,556.8
  region net NetRS_6_1: 209.312,561.6 208.512,561.6 208.512,559.8 209.312,559.8
  region net NetRS_16_1: 209.312,565.6 208.512,565.6 208.512,563.8 209.312,563.8
  region net NetRS_6_1: 209.012,562.2 208.812,562.2 208.812,559.2 209.012,559.2
  region net NetRS_16_1: 209.012,566.2 208.812,566.2 208.812,563.2 209.012,563.2
  region net NetDS_6_2: 206.812,558.2 206.612,558.2 206.612,556.8 206.812,556.8
  region net NetRS_8_1: 207.112,561.6 206.312,561.6 206.312,559.8 207.112,559.8
  region net NetRS_18_1: 207.112,565.6 206.312,565.6 206.312,563.8 207.112,563.8
  region net NetRS_8_1: 206.812,562.2 206.612,562.2 206.612,559.2 206.812,559.2
  region net NetRS_18_1: 206.812,566.2 206.612,566.2 206.612,563.2 206.812,563.2
  region net NetDS_6_2: 205.712,558.2 205.512,558.2 205.512,556.8 205.712,556.8
  region net NetRS_9_1: 205.712,562.2 205.512,562.2 205.512,559.2 205.712,559.2
  region net NetRS_19_1: 205.712,566.2 205.512,566.2 205.512,563.2 205.712,563.2
  pour cut-out: 205.1,491.3 203,491.3 203,485.412 205.1,485.412
  pour cut-out: 212.1,491.3 203.3,491.3 203.3,486.812 202.7,486.212 201.7,486.212 201.7,483.662 204.7,483.662 204.7,464.219 212.1,464.219
  region net VCC_3V3: 256.012,587
  region net VCC_3V3: 256.212,586.9
  region net ^PB2_BOOT1: 253.612,591.5
  region: 249.912,591.7
  region: 240.312,593.4
  region net GND: 235.812,593.3
  region net GND: 211.419,571.107
  region: 209.612,566.2
Bottom Layer:
  rectangle net PACK+: 407,415 488,426
  rectangle net VCC_5V1: 206.919,611.9 213.419,612.2
  pour cut-out: 205.7,480.6 205.7,467.3 198.8,460.4 198.8,451.9 206.3,444.4 206.3,442 207.9,442 207.9,444.8 200.3,452.4 200.3,459.7 207.4,466.8 207.4,480.9 205.7,482.6 205.7,488.1 204.3,489.5 204.3,490.9 203.135,490.9 203.135,488.435 204.2,487.369 204.2,482.1
  region: 207.019,612.2
  region: 223.8,398.6

## Silkscreen, mask and mechanical layers (free items; w line width, h text height)
Top Overlay:
  lines w0.1: 64.493,88.9 64.493,96.9 86.843,96.9 86.843,88.9 ; 64.5,88.9 53.8,88.9 53.8,185.2 349,185.2 349,88.9 338.3,88.9 ; 86.85,88.9 94.85,88.9 94.85,94.8 ; 94.843,94.8 cw(c96.843,94.8) 98.843,94.8 ; 98.85,94.8 98.85,84.15 110.05,84.15 ; 111.95,84.15 111.95,91.65 ; 112,84.15 125.1,84.15 125.1,91.7 cw(c126,91.7) 126.9,91.7 126.9,84.15 139.1,84.15 139.1,91.7 cw(c140,91.7) 140.9,91.7 140.9,84.15 153.1,84.15 153.1,91.7 cw(c154,91.7) 154.9,91.7 154.9,84.15 164.1,84.15 164.1,91.7 cw(c165,91.7) 165.9,91.7 165.9,84.15 169.1,84.15 169.1,91.7 cw(c170,91.7) 170.9,91.7 170.9,84.15 174.1,84.15 174.1,91.7 cw(c175,91.7) 175.9,91.7 175.9,84.15 179.1,84.15 179.1,91.7 cw(c180,91.7) 180.9,91.7 180.9,84.15 183.1,84.15 183.1,91.1 cw(c184.6,91.1) 186.1,91.1 186.1,86.9 196.7,86.9 198.1,89.9 198.1,91.9 192.55,91.9 cw(c192.55,93.35) 191.1,93.35 191.1,95.38 ; 191.1,95.373 cw(c192.62,95.373) 192.62,96.893 ; 192.62,96.9 338.3,96.9 ; 338.293,88.9 338.293,96.9 ; 94.85,94.8 94.85,94.8 ; 110.05,84.15 110.05,91.65 ; 110.05,84.15 110.05,84.15 ; 110.05,91.65 cw(c111,91.65) 111.95,91.65 ; 110.05,91.65 110.05,91.65 ; 111.95,91.65 111.95,91.65
  text "JLCJLCJLCJLC" at 123.5,149.5 h1.52 r270
Top Solder:
  rectangle: 126.9,84.1 139.1,89.9
  rectangle: 98.8,84.1 110.1,89.9
  rectangle: 111.9,84.1 125.1,89.9
  rectangle: 140.9,84.1 153.1,89.9
  rectangle: 154.9,84.1 164.1,89.9
  rectangle: 165.9,84.1 169.1,89.9
  rectangle: 171,84.1 174.1,89.9
  rectangle: 175.9,84.1 179.1,89.9
  rectangle: 180.9,84.1 183.1,89.9
  rectangle: 86.8,88.9 94.9,93
  region: 198.1,91.9 185.9,91.9 185.9,86.9 196.7,86.9 198.1,89.9
Bottom Solder:
  rectangle: 126.9,84.1 139.1,89.9
  rectangle: 154.9,84.1 164.1,89.9
  rectangle: 165.9,84.1 169.1,89.9
  rectangle: 170.9,84.1 174.1,89.9
  rectangle: 175.9,84.1 179.1,89.9
  rectangle: 180.9,84.1 183.1,89.9
  rectangle: 140.9,84.1 153.1,89.9
  rectangle: 112,84.1 125.1,89.9
  rectangle: 98.8,84.1 110.1,89.9
  rectangle: 86.8,88.9 94.9,93
  region: 198.1,91.9 185.9,91.9 185.9,86.9 196.7,86.9 198.1,89.9
Mechanical 3:
  text "L" at 370.819,360.3 h10 r180
Mechanical 15:
  text "L" at 336.019,360.7 h4 r180